# EAGLE board panel - type II - standard (EAGLE 6.1)
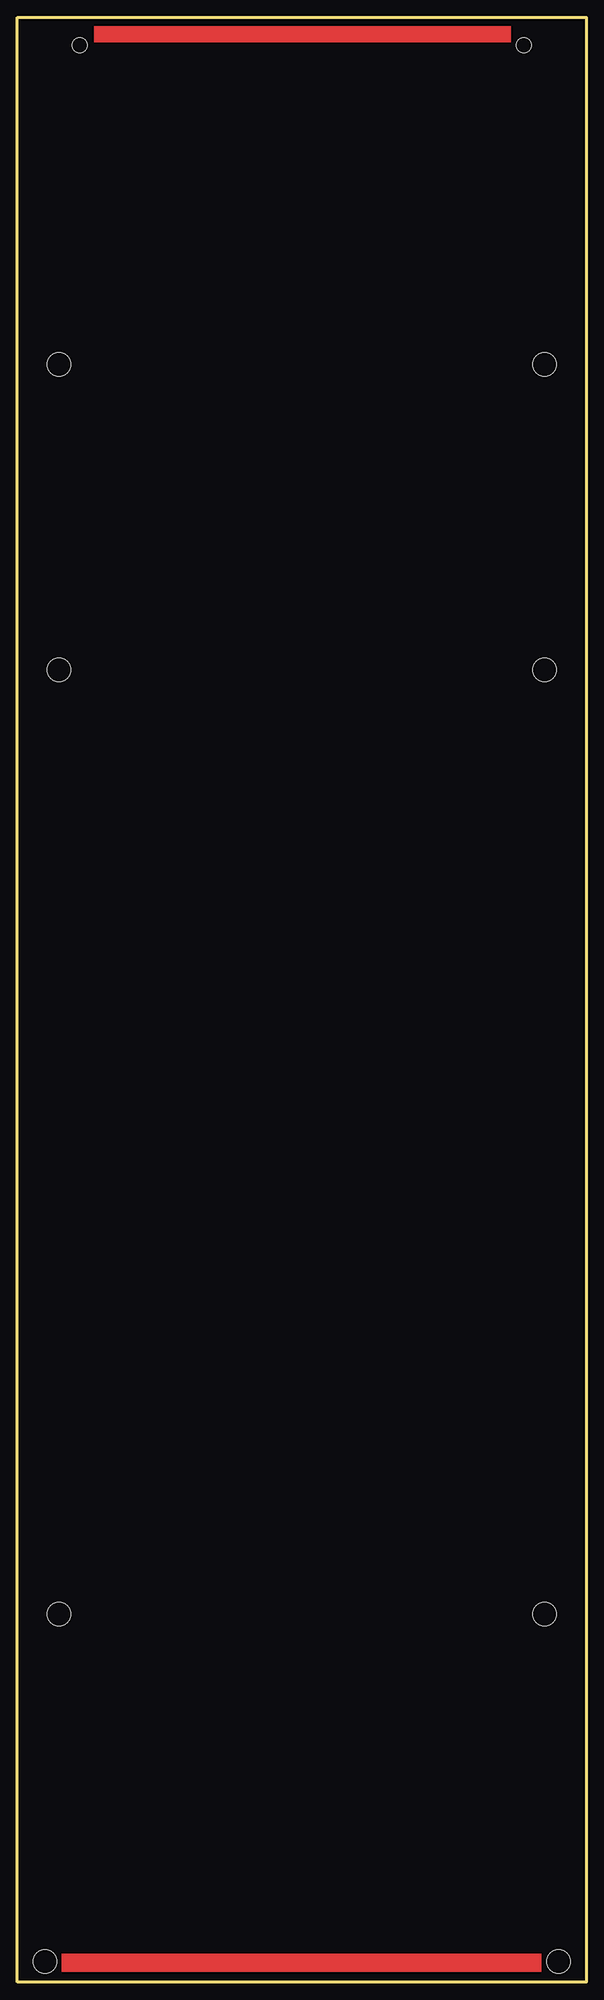
[diagram p0: board, top side]
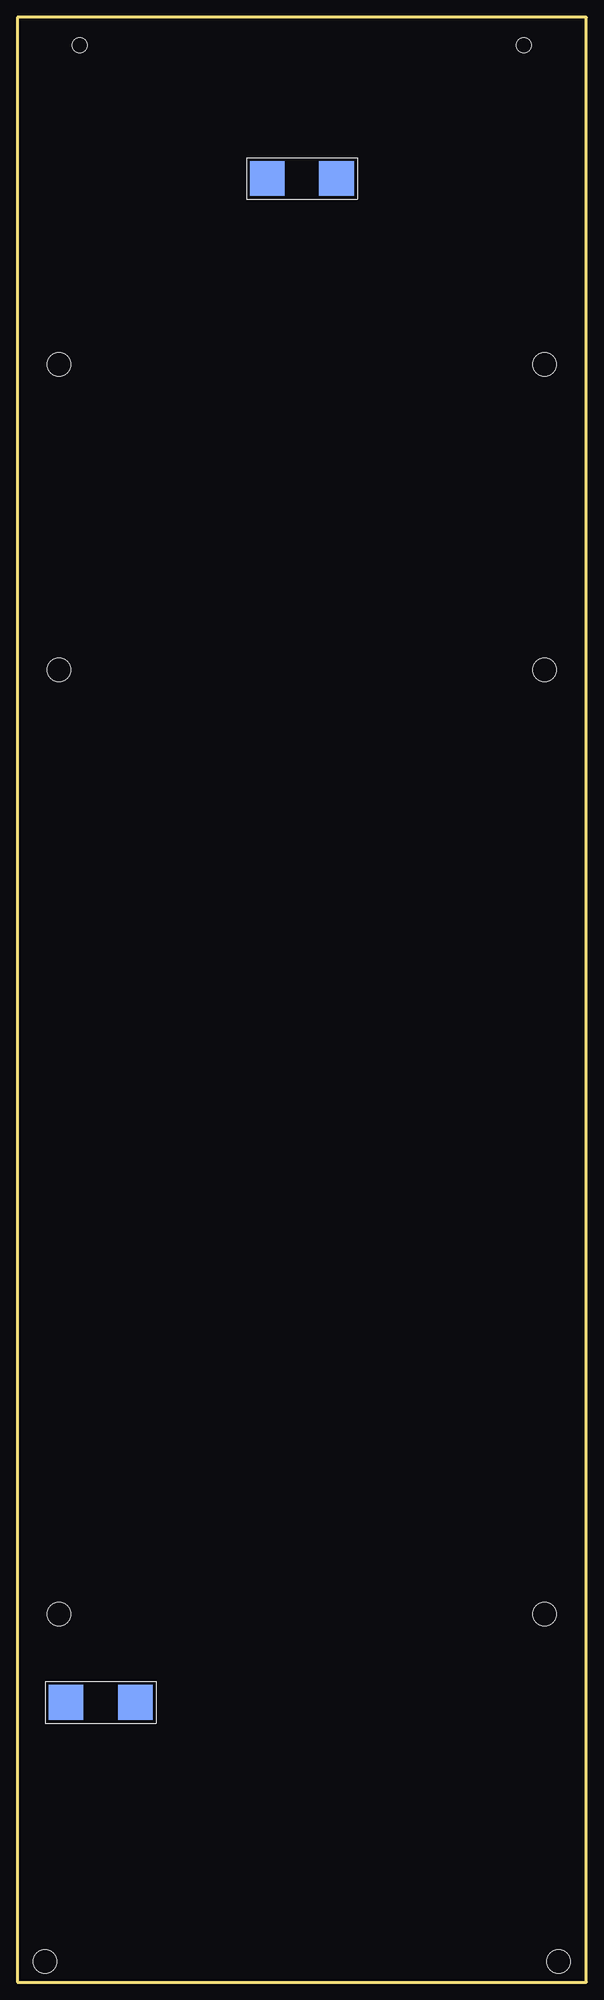
[diagram p1: board, bottom side, seen from below]

Size 82 x 283 mm. Coordinates in mm from the lower left corner, seen from the top.
Outline: 0,0 0,283 82,283 82,0 0,0
Copper layers (1*16): Top 0.035mm / dielectric 1.5mm / Bottom 0.035mm
Design rules: minimum track width 10mil, minimum drill 24mil, track to track 8mil, track to pad 8mil, pad to pad 8mil, via to via 8mil, smd to smd 8mil, copper to edge 40mil, drill to drill 8mil, minimum pad ring 10mil, minimum via ring 8mil, stop-mask expansion 4mil, vias tented up to drill 0mil, thermal gap 10mil
Holes 3.4 mm at 4,3 78,3 6,53 6,189 6,233 76,53 76,189 76,233
Holes 2.2 mm at 9,279 73,279

## Footprints (pad centres in the part's own frame; a part is rotated, then mirrored left to right if it is on the bottom)
GENERIC-2PORT = smd 5 x 5: P$1 5,0; P$2 -5,0

## Placement (x,y rotation side)
E$1  [GENERIC-2PORT]  70,40.3 0 bottom
E$2  [GENERIC-2PORT]  41,259.8 0 bottom

## Library data of the parts
E$1 E$2 = space-concordia-power

## Tracks (layer width: path | path; a pad name or v marks a point on that pad's centre or on a via)
S$1
  Bottom 0.406: 66.4,42.3 66.5,42.3
S$3
  Bottom 0.406: 47,257.5 46.9,257.5
S$7
  Bottom 0.406: 37.1,258.5 38,258.5
(copper drawn outside any net)
  shapes: Top area x2